# Altium PCB microbit-motion-tracking.PcbDoc
Units mm, origin at the board's own origin, x right, y up, seen from the top; angles counter-clockwise.
Board outline 13.97 x 10.16 mm, 2 copper layers (TOP, BOT), stack 1.661 mm thick; 10 components, 8 nets, 44 pads, 6 vias.
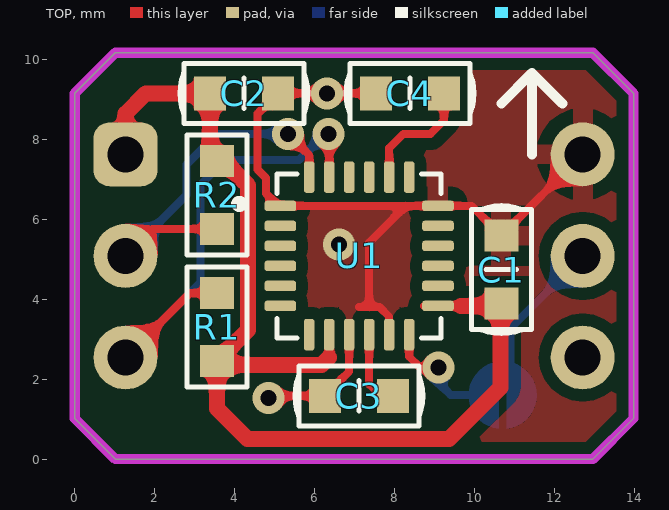
[diagram p0: TOP view]
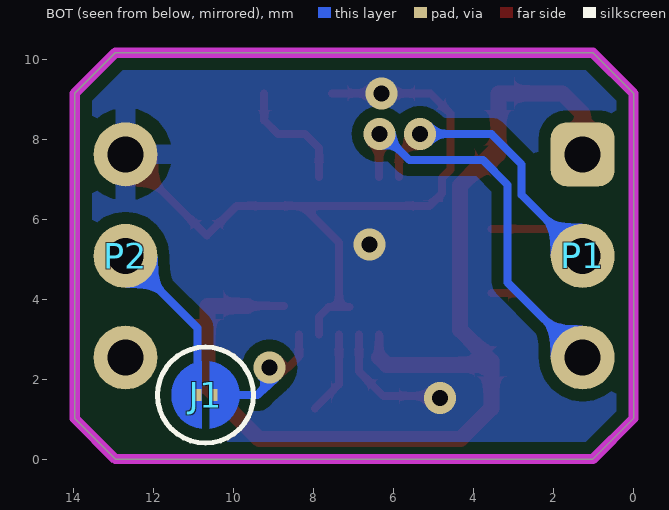
[diagram p1: BOT view, seen from below]
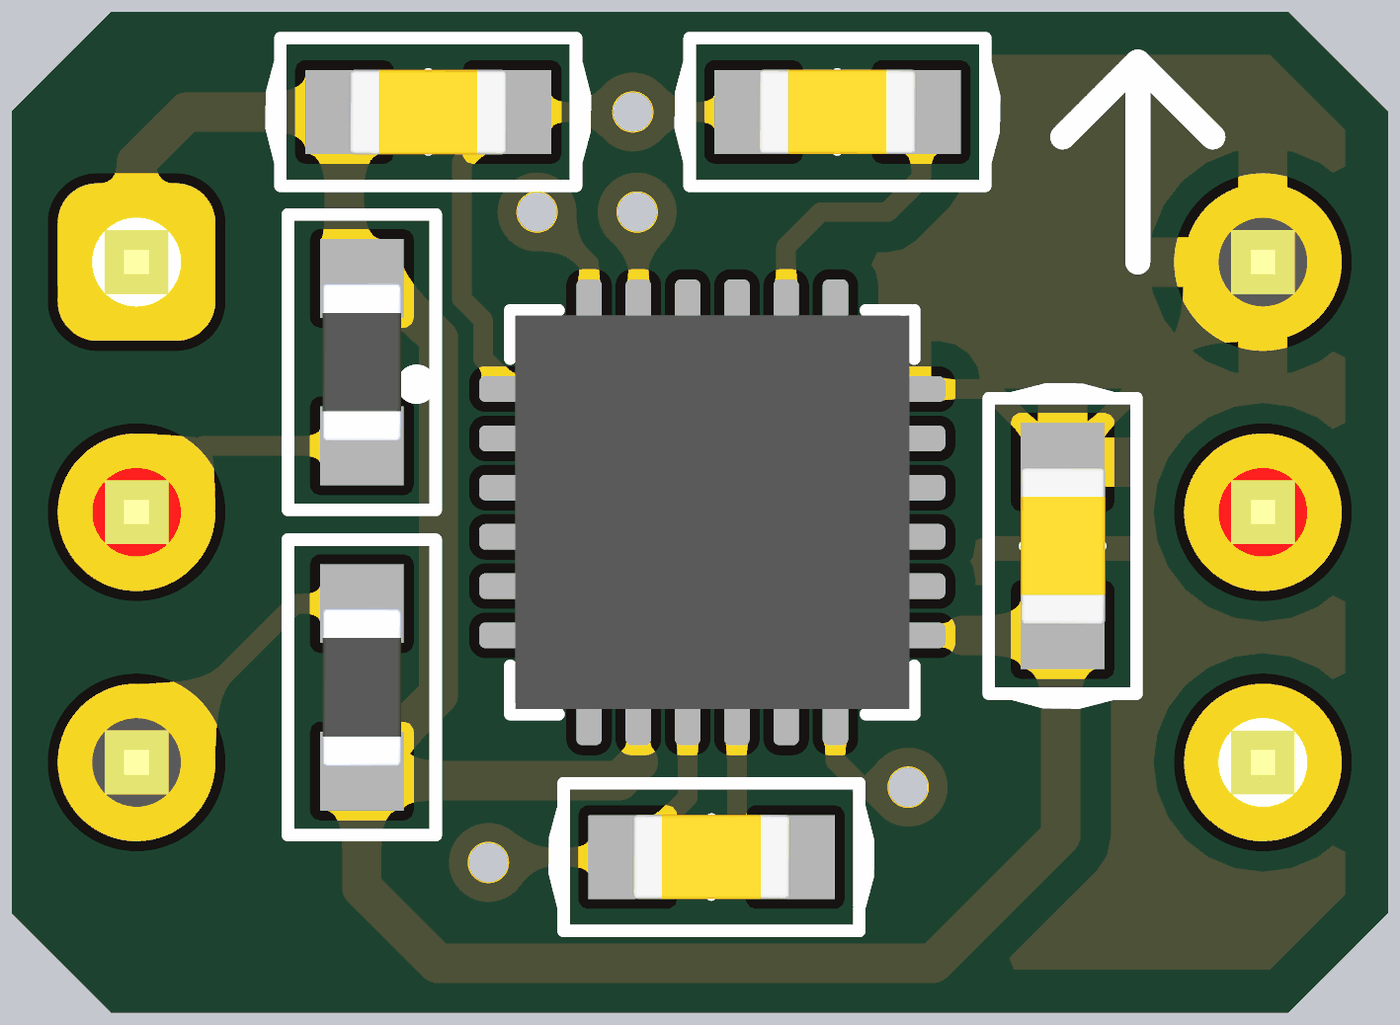
[diagram p2: 3D render of the assembled board from above, using the file's embedded part models]

## Layer stack, top to bottom
Top Solder: solder mask 0.0102, Solder Resist, Dk 3.5
TOP: signal copper 0.0356
Dielectric 1: core 1.59, FR-4, Dk 4.2
BOT: signal copper 0.0356
Bottom Solder: solder mask 0.0102, Solder Resist, Dk 3.5

## Board outline
0,1.016 1.016,0 12.954,0 13.97,1.016 13.97,9.144 12.954,10.16 1.016,10.16 0,9.144

## Design rules (kind name [scope] priority, off if disabled: settings)
Clearance Clearance_1 [InPolygon] p1: gap=0.3 ignorepadtopadclearanceinfootprint=FALSE except(0: Arc-Hole Track-Hole SMDPad-Hole THPad-Hole Via-Hole Fill-Hole Poly-Hole Region-Hole Text-Hole)
Clearance [All] p2: gap=0.152 ignorepadtopadclearanceinfootprint=FALSE except(0: Arc-Hole Track-Hole SMDPad-Hole THPad-Hole Via-Hole Fill-Hole Poly-Hole Region-Hole Text-Hole)
ComponentClearance ComponentClearance_1 [InComponent('J10') OR InComponent('A1') OR InComponent('TP*')] p1: gap=0 collisioncheckmode=3 verticalgap=0 showdistances=FALSE
ComponentClearance [All] p2: gap=0.254 collisioncheckmode=3 verticalgap=0.2 showdistances=FALSE
PlaneConnect [All] p1: planeconnectstyle=Direct reliefexpansion=0.508 reliefentries=4 reliefconductorwidth=0.254 reliefairgap=0.254
PolygonConnect PolygonConnect_1 [IsVia] p1: connectstyle=Direct reliefconductorwidth=0.254 reliefentries=4 polygonreliefangle="90 Angle" airgapwidth=0.254
PolygonConnect [All] p2: connectstyle=Relief reliefconductorwidth=0.5 reliefentries=4 polygonreliefangle="90 Angle" airgapwidth=0.35
RoutingVias [All] p1: holewidth=0.4 width=0.8 viastyle="Through Hole" minholewidth=0.3 minwidth=0.6 maxholewidth=4 maxwidth=8
SolderMaskExpansion [All] p1: expansion=0.102
Width [All] p1: maxlimit=5 minlimit=0.152 preferedwidth=0.3
28 further rules are at their usual default settings.

## Components (designator, comment, footprint, x,y, rotation, side; value= is the part's Value field where it differs from the comment)
C1 "0.01uF" "C 0603" 10.668,4.738 r90 top
C2 "0.1uF" "C 0603" 4.23,9.144 r0 top
C3 "0.1uF" "C 0603" 7.104,1.579 r180 top
C4 "2.2nF" "C 0603" 8.382,9.144 r180 top
J1 "JUMP 2" JUMP/2/SMD/D 10.7,1.6 r180 bottom
P1 "Header 3" HDR/Header/3/c1#1 1.27,5.08 r270 bottom locked
P2 "Header 3" HDR/Header/3/c1#2 12.7,5.08 r90 bottom locked
R1 "N/A" "R 0603" 3.556,3.302 r270 top
R2 "N/A" "R 0603" 3.556,6.604 r90 top
U1 "MPU-6050" "QFN 50P 24 400X400X95" 7.112,5.08 r0 top

## Footprints (in the part's own frame and the unit in brackets; to place one, negate y for a bottom-side part, rotate by r counter-clockwise, add the part's x,y. Pads: shape width x height; smd on the part's side, far side on the other; paste and mask are expansions set on the pad)
"C 0603" [mm] "Chip Capacitor, 2-Leads, Body 1.6x0.8mm, IPC Medium Density"
  rect 0.8x0.85 smd: 1(-0.85,0) 2(0.85,0)
  silkscreen extent -1.6,-0.75 1.6,0.75, body extent -0.8,-0.43 0.8,0.43, height 0.81
HDR/Header/3/c1#1 [mm]
  rrect50% 1.6x1.6 hole 0.9: 1(-2.54,0)
  round 1.6 hole 0.9: 2(0,0) 3(2.54,0)
  body extent -3.81,-1.27 3.81,1.27, height 8.89
HDR/Header/3/c1#2 [mm]
  round 1.6 hole 0.9: 1(-2.54,0) 2(0,0) 3(2.54,0)
  body extent -3.81,-1.27 3.81,1.27, height 8.89
JUMP/2/SMD/D [mm] "Chip Resistor, 2-Leads, Body 1.6x0.8mm, IPC Medium Density"
  rect 0.2x0.3 smd: 1(-0.2,0) 2(0.2,0)
  TOP region: -0.1,-0.844 -0.481,-0.7 -0.752,-0.396 -0.85,0 -0.85,0 -0.752,0.396 -0.481,0.7 -0.1,0.844 -0.1,0.844
  TOP region: 0.1,0.844 0.482,0.7 0.752,0.396 0.85,0 0.85,0 0.752,-0.396 0.482,-0.7 0.1,-0.844 0.1,-0.844
  silkscreen extent -1.2,-1.2 1.2,1.2
"QFN 50P 24 400X400X95" [mm]
  rrect50% 0.79x0.26 smd: 1(-1.97,1.25) 2(-1.97,0.75) 3(-1.97,0.25) 4(-1.97,-0.25) 5(-1.97,-0.75) 6(-1.97,-1.25) 13(1.97,-1.25) 14(1.97,-0.75) 15(1.97,-0.25) 16(1.97,0.25) 17(1.97,0.75) 18(1.97,1.25)
  rrect50% 0.26x0.79 smd: 7(-1.25,-1.97) 8(-0.75,-1.97) 9(-0.25,-1.97) 10(0.25,-1.97) 11(0.75,-1.97) 12(1.25,-1.97) 19(1.25,1.97) 20(0.75,1.97) 21(0.25,1.97) 22(-0.25,1.97) 23(-0.75,1.97) 24(-1.25,1.97)
  silkscreen extent -3.1,-2.05 2.05,2.05, body extent -2,-2 2,2, height 0.93
"R 0603" [mm] "Chip Resistor, 2-Leads, Body 1.6x0.8mm, IPC Medium Density"
  rect 0.8x0.85 smd: 1(-0.85,0) 2(0.85,0)
  silkscreen extent -1.5,-0.75 1.5,0.75, body extent -0.8,-0.4 0.8,0.4, height 0.5

## Part data
C1 C2 C3 C4: library part "Capacitor NP", "Capacitor non-pol"
P1 P2: "Header, 3-Pin"
R1 R2: library part Resistor, "Resistor"
U1: "Accelerometer, Gyroscope, 6 Axis Sensor I²C Output", Package="VFQFN-24 TDK InvenSense", Availability=Unavailable, MF="TDK InvenSense", MP=MPU-6050, Price=None, SnapEDA_Link=https://www.snapeda.com/parts/MPU-6050/TDK%20InvenSense/view-part/4503180/?ref=snap

## Via types
v1: diameter 0.8, hole 0.4, TOP to BOT, tented both sides, 6 vias

## Nets (pads, with @x,y where several pads share a name; then routed paths per layer and width w, separated by ;. In a path a pad name is that pad's centre, name@x,y a point inside that pad or via, vN(x,y) a via of type N, cw(c..) or ccw(c..) an arc to the next point about the centre after c; other vN are vias at no path point)
3V: C1.1 C2.1 P1.1 R1.2 R2.2 U1.8 U1.13 | length 27.8
  TOP w0.2: 6.362,2.545 U1.8 ; U1.13@8.738,3.83 U1.13 9.652,3.83
  TOP w0.4: P1.1 1.27,8.636 1.778,9.144 C2.1 3.38,7.796 R2.2@3.722,7.454 ; R2.2@3.39,7.62 R2.2 R2.2@3.722,7.454 ; 6.362,2.545 6.173,2.357 3.793,2.357 3.722,2.286 R1.2 ; 9.652,3.83 10.648,3.83 10.648,1.796 9.352,0.5 4.326,0.5 3.556,1.27 R1.2 ; R1.2 4.333,3.229 4.333,6.843 R2.2@3.722,7.454
GND: C1.2 C2.2 C3.2 C4.2 P2.3 U1.1 U1.9 U1.11 U1.18 | length 21.9
  TOP w0.2: v1(4.84,1.524) 4.895,1.579 C3.2 6.862,2.187 U1.9 ; 7.104,3.8 7.362,3.8 ; C4.2 v1(6.306,9.144) C2.2 4.572,8.636 4.572,7.244 4.786,7.03 4.786,6.644 5.1,6.33 U1.1 8.274,6.33 ; U1.11 7.862,3.558 7.62,3.8 7.362,3.8 ; P2.3 C1.2 9.926,6.33 U1.18 8.274,6.33 ; 7.362,3.8 7.362,5.418 8.274,6.33
  other v1: 6.604,5.367
INT: J1.1 P2.2 | length 4.7
  BOT w0.2: J1.1 10.9,3.28 P2.2 P2.2@12.7,4.608
NetC3_1: C3.1 U1.10 | length 2.1
  TOP w0.2: U1.10 7.362,1.87 C3.1@7.962,1.27
NetC4_1: C4.1 U1.20 | length 3.1
  TOP w0.2: U1.20 7.862,7.774 8.216,8.128 8.89,8.128 9.232,8.47 C4.1
NetJ1_2: J1.2 U1.12 | length 3.3
  TOP w0.2: U1.12 8.362,2.56 8.633,2.289 v1(9.1,2.289)
  BOT w0.2: v1(9.1,2.289) 9.1,1.9 9.4,1.6 J1.2
SCL: P1.3 R1.1 U1.23 | length 12.9
  TOP w0.2: P1.3 2.882,4.152 R1.1 ; v1(6.35,8.128) 6.362,8.116 U1.23
  BOT w0.2: P1.3 3.146,4.416 3.146,6.858 3.764,7.476 5.604,7.476 6.257,8.128 v1(6.35,8.128)
SDA: P1.2 R2.1 U1.24 | length 9.6
  TOP w0.2: P1.2 1.944,5.754 R2.1 ; v1(5.334,8.128) 5.862,7.6 U1.24
  BOT w0.2: P1.2 2.794,6.604 2.794,7.366 3.556,8.128 v1(5.334,8.128)
pads on no net: P2.1 U1.2 U1.3 U1.4 U1.5 U1.6 U1.7 U1.14 U1.15 U1.16 U1.17 U1.19 U1.21 U1.22

## Polygon pours and split planes (outlines as drawn)
GND on TOP "Top Layer-GND_12V" (solid, remove dead copper, pour order 4): 0,0 0,10.16 13.97,10.16 13.97,0 0,0
GND on BOT "Bot Layer-GND_12V" (solid, remove dead copper, pour order 8): 0,0 0,10.16 13.97,10.16 13.97,0 0,0

## Keep-outs
Keep-Out Layer:
  the board outline again, w0.254

## Silkscreen, mask and mechanical layers (free items; w line width, h text height)
Top Overlay:
  lines w0.254: 10.668,8.89 11.43,9.652 ; 11.43,7.62 11.43,9.652 ; 12.192,8.89 11.43,9.652
Mechanical 1:
  lines w0.254: 1.27,5.08 12.7,5.08 ; 0,0 13.97,0 13.97,10.16 0,10.16 0,0